# Altium PCB Digital MEMS Microphone.PcbDoc (part 2 of 2)
Units mil, origin at the board's own origin, x right, y up, seen from the top; angles counter-clockwise.
Board outline 1363.78 x 1181.1 mil, 2 copper layers (Top Layer, Bottom Layer); 43 components, 27 nets, 123 pads, 37 vias.
Unrouted connection lines stored in the file: 3.
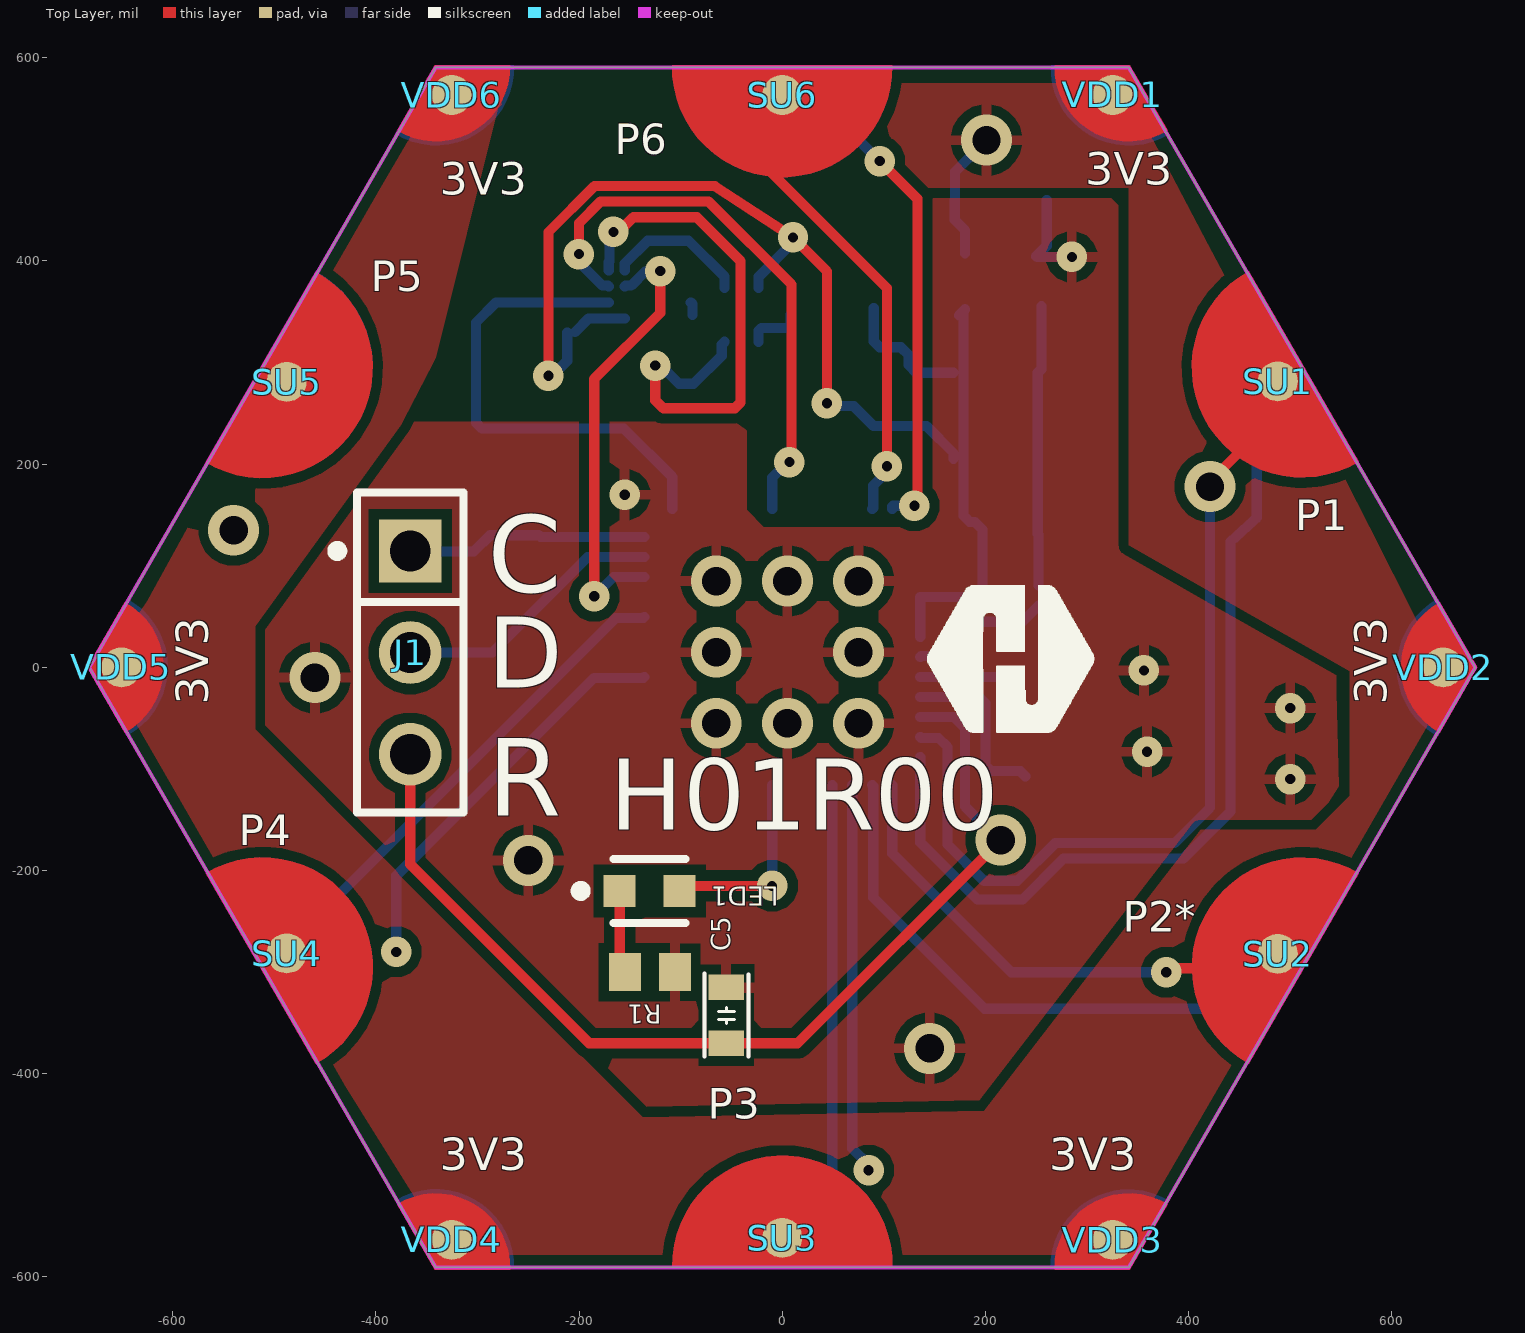
[diagram p0: Top Layer view]

## Via types
v1: diameter 30, hole 10, Top Layer to Bottom Layer, 22 vias
v2: diameter 50, hole 28, Top Layer to Bottom Layer, 15 vias

## Nets (pads, with @x,y where several pads share a name; then routed paths per layer and width w, separated by ;. In a path a pad name is that pad's centre, name@x,y a point inside that pad or via, vN(x,y) a via of type N, cw(c..) or ccw(c..) an arc to the next point about the centre after c; other vN are vias at no path point) (continued)
NetLED1_1: LED1.1 R1.2 | length 82.1
  Top Layer w10: LED1.1 -160,-295 R1.2
NetLED1_2: LED1.2 U1.19 | length 192.3
  Top Layer w10: LED1.2 -95.94,-215 v1(-10,-215)
  Bottom Layer w10: v1(-10,-215) -9.92,-214.92 -9.92,-115.91 U1.19
NetU1_8: U1.8 X1.P$3 | length 79.2
  Bottom Layer w10: U1.8 X1.P$3@215,-9.53
NetU1_9: U1.9 X1.P$1 | length 171.5
  Bottom Layer w10: U1.9 194.14,-29.21 200,-35.07 200,-96.27 205.86,-102.13 234.21,-102.13 X1.P$1@239.21,-107.13
NetU2_4: U2.4 U3.A1 | length 139.9
  Bottom Layer w10: U3.A1 -155,397.54 -132.54,420 -92.24,420 -56.73,384.49 U2.4
NRST: C5.2 J1.3 U1.10 | length 1019.8
  Top Layer w10: J1.3 -366.16,-193.84 -190,-370 -55,-370 15,-370 v2(215,-170)
  Bottom Layer w10: U1.10 168.9,-48.9 180,-60 180,-137 213,-170 v2(215,-170)
Sample_Rate: U2.3 U3.A2 | length 550.7
  Top Layer w10: v1(-166.29,428.68) -160.88,428.68 -146.56,443 -84.21,443 -41,399.79 -41,260.86 -46.86,255 -117,255 -125,263 v1(-125,297)
  Bottom Layer w10: U3.A2 -170.75,398.81 -170.12,399.44 -170.12,424.86 v1(-166.29,428.68) ; v1(-125,297) -119.59,297 -101.69,279.1 -87.32,279.1 -59.61,306.81 -59.61,317.64 U2.3
UART1_RX: SD4.UART_D U1.32 | length 430
  Bottom Layer w10: -450,-230 -442.57,-230 -163.95,48.62 -136.73,48.62 U1.32
UART1_TX: SU4.UART_U U1.29 | length 400.1
  Bottom Layer w10: v1(-380,-280) -380,-205 -185.43,-10.43 -136.73,-10.43 U1.29
UART2_RX: SD2.UART_D U1.14 | length 518.9
  Bottom Layer w10: U1.14 89.49,-116.73 89.49,-226.49 199,-336 429,-336 434.86,-330.14 434.86,-321.86 431,-318 431,-317
UART2_TX: SU2.UART_U U1.13 | length 425.4
  Top Layer w10: v1(377.95,-300) 381.77,-296.17 407.83,-296.17 414,-290
  Bottom Layer w10: U1.13 108.27,-182.86 225.41,-300 v1(377.95,-300)
UART3_RX: SD6.UART_D U1.48 | length 429.8
  Top Layer w10: v1(95.96,498.28) 133,461.24 133,162.18 v1(130,159.17)
  Bottom Layer w10: 60,531 63.24,531 v1(95.96,498.28) ; U1.48 108.27,158.27 109.17,159.17 v1(130,159.17)
UART3_TX: SU6.UART_U U1.47 | length 409.5
  Top Layer w10: -29,504 -27.77,504 103,373.23 v1(103,198)
  Bottom Layer w10: U1.47 89.49,156.73 89.49,179.08 103,192.59 v1(103,198)
UART4_RX: SD1.UART_D U1.12 | length 891.9
  Bottom Layer w10: U1.12 135.83,-172.04 192.39,-228.61 236.39,-228.61 277,-188 395,-188 441,-142 441,123.81 463.88,144.31 464.07,144.5 467,147.43 467,260.7 SD1.UART_D
UART4_TX: SU1.UART_U U1.11 | length 846.1
  Top Layer w10: v2(421,178) 421,183 488.43,250.43
  Bottom Layer w10: U1.11 136.73,-69.49 153.83,-69.49 162.56,-78.22 162.56,-174.13 198.43,-210 231.57,-210 268.63,-172.94 386.06,-172.94 421,-138 v2(421,178)
UART5_RX: U1.41
UART6_RX: SD3.UART_D U1.16 | length 400.9
  Bottom Layer w10: 45,-515 49.21,-510.79 U1.16
UART6_TX: SU3.UART_U U1.15 | length 385.8
  Bottom Layer w10: U1.15 68.9,-473.49 85,-489.59 v1(85,-495)
VDD: D1.2 FB1.1 VDD1.Pwr_U VDD2.Pwr_U VDD3.Pwr_U VDD4.Pwr_U VDD5.Pwr_U VDD6.Pwr_U | length 128.7
  Bottom Layer w10: FB1.1 180,430 169.72,440.28 D1.2 170,460.28 170,488 v2(201,519)
VDDA: C1.2 C2.1 C3.2 C4.2 C6.2 C7.2 C8.2 FB1.2 U1.4 U1.5 U1.6 U2.1 U3.D1 U3.D2 | length 1426.7
  Top Layer w10: v1(-230.12,287) -230.12,428.5 -184.93,473.68 -66.47,473.68 v1(10.55,423.25) 44,389.8 v1(44,260)
  Bottom Layer w10: v1(-230.12,287) -226.39,287 -211.72,301.67 C6.2@-211.72,329.69 ; C6.2@-204,330 -190.5,343.5 U3.D2 U3.D1 ; U2.1 -23.27,384.49 10.55,418.31 v1(10.55,423.25) ; v1(44,260) 46.83,257.17 70.35,257.17 90.08,237.44 C8.2 142.06,237.44 168.5,211 C2.1 ; C7.2 90,321.02 95.86,315.16 116.66,315.16 124.33,307.49 124.33,297.67 132,290 C4.2 ; U1.6 U1.5 U1.4 C1.2@193.45,69.21 ; FB1.2@173.78,346.22 FB1.2 ; FB1.2@178.5,346.83 178.5,149.16 184.55,143.11 189.47,143.11 197.07,135.52 C3.2 C1.2
VSSA: C1.1 C2.2 C3.1 C4.1 C6.1 C7.1 C8.1 R3.2 U1.7 U2.2 U2.5 U3.C1 | length 480.9
  Bottom Layer w10: U2.5@-90.12,359.25 -88.23,357.36 U2.5@-88.23,347.09 ; U2.2 -23.27,331.34 -20.39,334.21 6.34,334.21 8.23,336.1 U2.5@8.23,347.09 ; U1.7 136.73,11.06 157.65,11.06 191.58,45 236.51,45 252.19,60.67 ; C3.1@251.5,131.48 251.5,290 255,293.5 R3.2@255,355.39 ; C1.1 C3.1
pads on no net: U1.1 U1.2 U1.3 U1.17 U1.18 U1.20 U1.21 U1.22 U1.23 U1.24 U1.25 U1.26 U1.27 U1.28 U1.30 U1.31 U1.33 U1.38 U1.39 U1.40 U1.43 U1.44 U1.45 U1.46

## Polygon pours and split planes (outlines as drawn)
GND on Bottom Layer "GND_L02_P017" (solid, pour order 17): -125,210.51 -125,155 340.94,155 340.94,-355 445,-355 445,-415 405,-470 390,-503.59 325.2,-568.39 -321.75,-568.39 -324.28,-565.86 -650.39,-5 -319.49,564.1 -319.49,230 -300,210.51
GND on Bottom Layer "GND_L02_P015" (solid, pour order 15): 241.23,544.12 352.57,544.12 617,62 619,60 651.01,0 485,-298.68 173.67,-298.68
VSSA on Bottom Layer "VSSA_L02_P013" (solid, pour order 13): 340.94,479 268,585 -305,585 -305,226 340.94,226
GND on Bottom Layer "GND_L02_P008" (solid, pour order 8): 118.51,53.13 380,53.13 380,-140 118.51,-140
VSSA on Bottom Layer "VSSA_L02_P001" (solid, pour order 1): 265.95,385.56 340.94,385.56 340.94,64 240,64 240,359.62
VDD on Top Layer "VDD_L01_P014" (solid, pour order 14): 419,-435 357.48,-546.37 293.7,-580 -325.2,-580 -400,-460 -540.18,-235.11 -625,-75 -670,0 -625,65 -545,210 -518.88,259.35 -395,472 -335,575 -266.61,563.39 -280,550 -340.94,305 -375.72,238.11 -518.88,40.27 -518.88,-61.12 -137.31,-442.69 198.86,-436.18 411.63,-160 525,-160 558.59,-126.41 558.59,-3.69 531,12 427.87,70.64 340.94,120.07 341,472 117.79,472 82.08,531.58 97.14,575 335,575 382.72,485.01 419,416.6 536.77,187.77 545,187.77 553.6,185.66 565.29,162.64 577.53,138.53 625,45 632,45 632,-39 636,-43 634.5,-44.5 635,-75 611.96,-121.13 590,-160 550,-200 535,-200 535,-225
GND on Top Layer "GND_L01_P016" (solid, pour order 16): -175,-455 -530,-100 -530,242 -35,242 -35,155 -18,138 145,138 145,462.16 332,462.16 332,170.97 545,0 545,-23.65 547.94,-116.91 327.79,-455

## Keep-outs
Keep-Out Layer:
  the board outline again, w3.94

## Silkscreen, mask and mechanical layers (free items; w line width, h text height)
Top Overlay:
  drawing of 1337 lines, arcs and shapes, not listed
  text "P6" at -165,505.01 h30
  text "3V3" at 298,475.01 h32
  text "3V3" at -337,465.01 h32
  text "P5" at -405,370.01 h30
  text "P1" at 505,135.01 h30
  text "C" at -290,74.02 h76
  text "D" at -290,-19.99 h70
  text "3V3" at -565.01,-37 h32 r90
  text "3V3" at 594.99,-37 h32 r90
  text "R" at -290,-145.98 h76
  text "H01R00" at -170,-160 h70
  text "P4" at -535,-174.99 h30
  text "P2*" at 335,-259.99 h30
  text "P3" at -73.14,-444.45 h30
  text "3V3" at -337,-494.99 h32
  text "3V3" at 263,-494.99 h32
Bottom Overlay:
  text "P6" at -125,510.01 h30
  text "GND" at 382,475.01 h32
  text "GND" at -273,470.01 h32
  text "P5" at -370,370.01 h30
  text "P1" at 535,135.01 h30
  text "GND" at -575.01,32 h32 r90
  text "GND" at 544.99,-19 h32 r90
  text "P4" at -490,-174.99 h30
  text "P2*" at 380,-259.99 h30
  text "P3" at -35,-449.99 h30
  text "GND" at -337,-465.01 h32 r180
  text "GND" at 263,-465.01 h32 r180
Top Solder:
  drawing of 20 lines, arcs and shapes, not listed
Dimensions:
  the board outline again, w3.94

## Text inside footprints (layer, text, board x,y; h text height)
C2: Mechanical 32 "1" at 158.5,205 h25 r180; Mechanical 32 "2" at 231.5,205 h25 r180; Mechanical 33 "C40" at 278.5,212.17 h25 r180
C4: Mechanical 32 "2" at 178.5,290 h25; Mechanical 32 "1" at 251.5,290 h25; Mechanical 33 "C40" at 131.5,282.83 h25
C7: Mechanical 32 "2" at 90,363.5 h25 r90; Mechanical 32 "1" at 90,436.5 h25 r90; Mechanical 33 "C40" at 97.17,316.5 h25 r90